# Altium PCB ALTAIR_PD_Squad_V26.5a_cut.PcbDoc (part 3 of 4)
Units mm, origin at the board's own origin, x right, y up, seen from the top; angles counter-clockwise.
Board outline 74 x 56 mm, 4 copper layers (Top Layer, Layer 2, Layer 3, Bottom Layer), stack 1.818 mm thick; 213 components, 155 nets, 610 pads, 404 vias.
Unrouted connection lines stored in the file: 6.
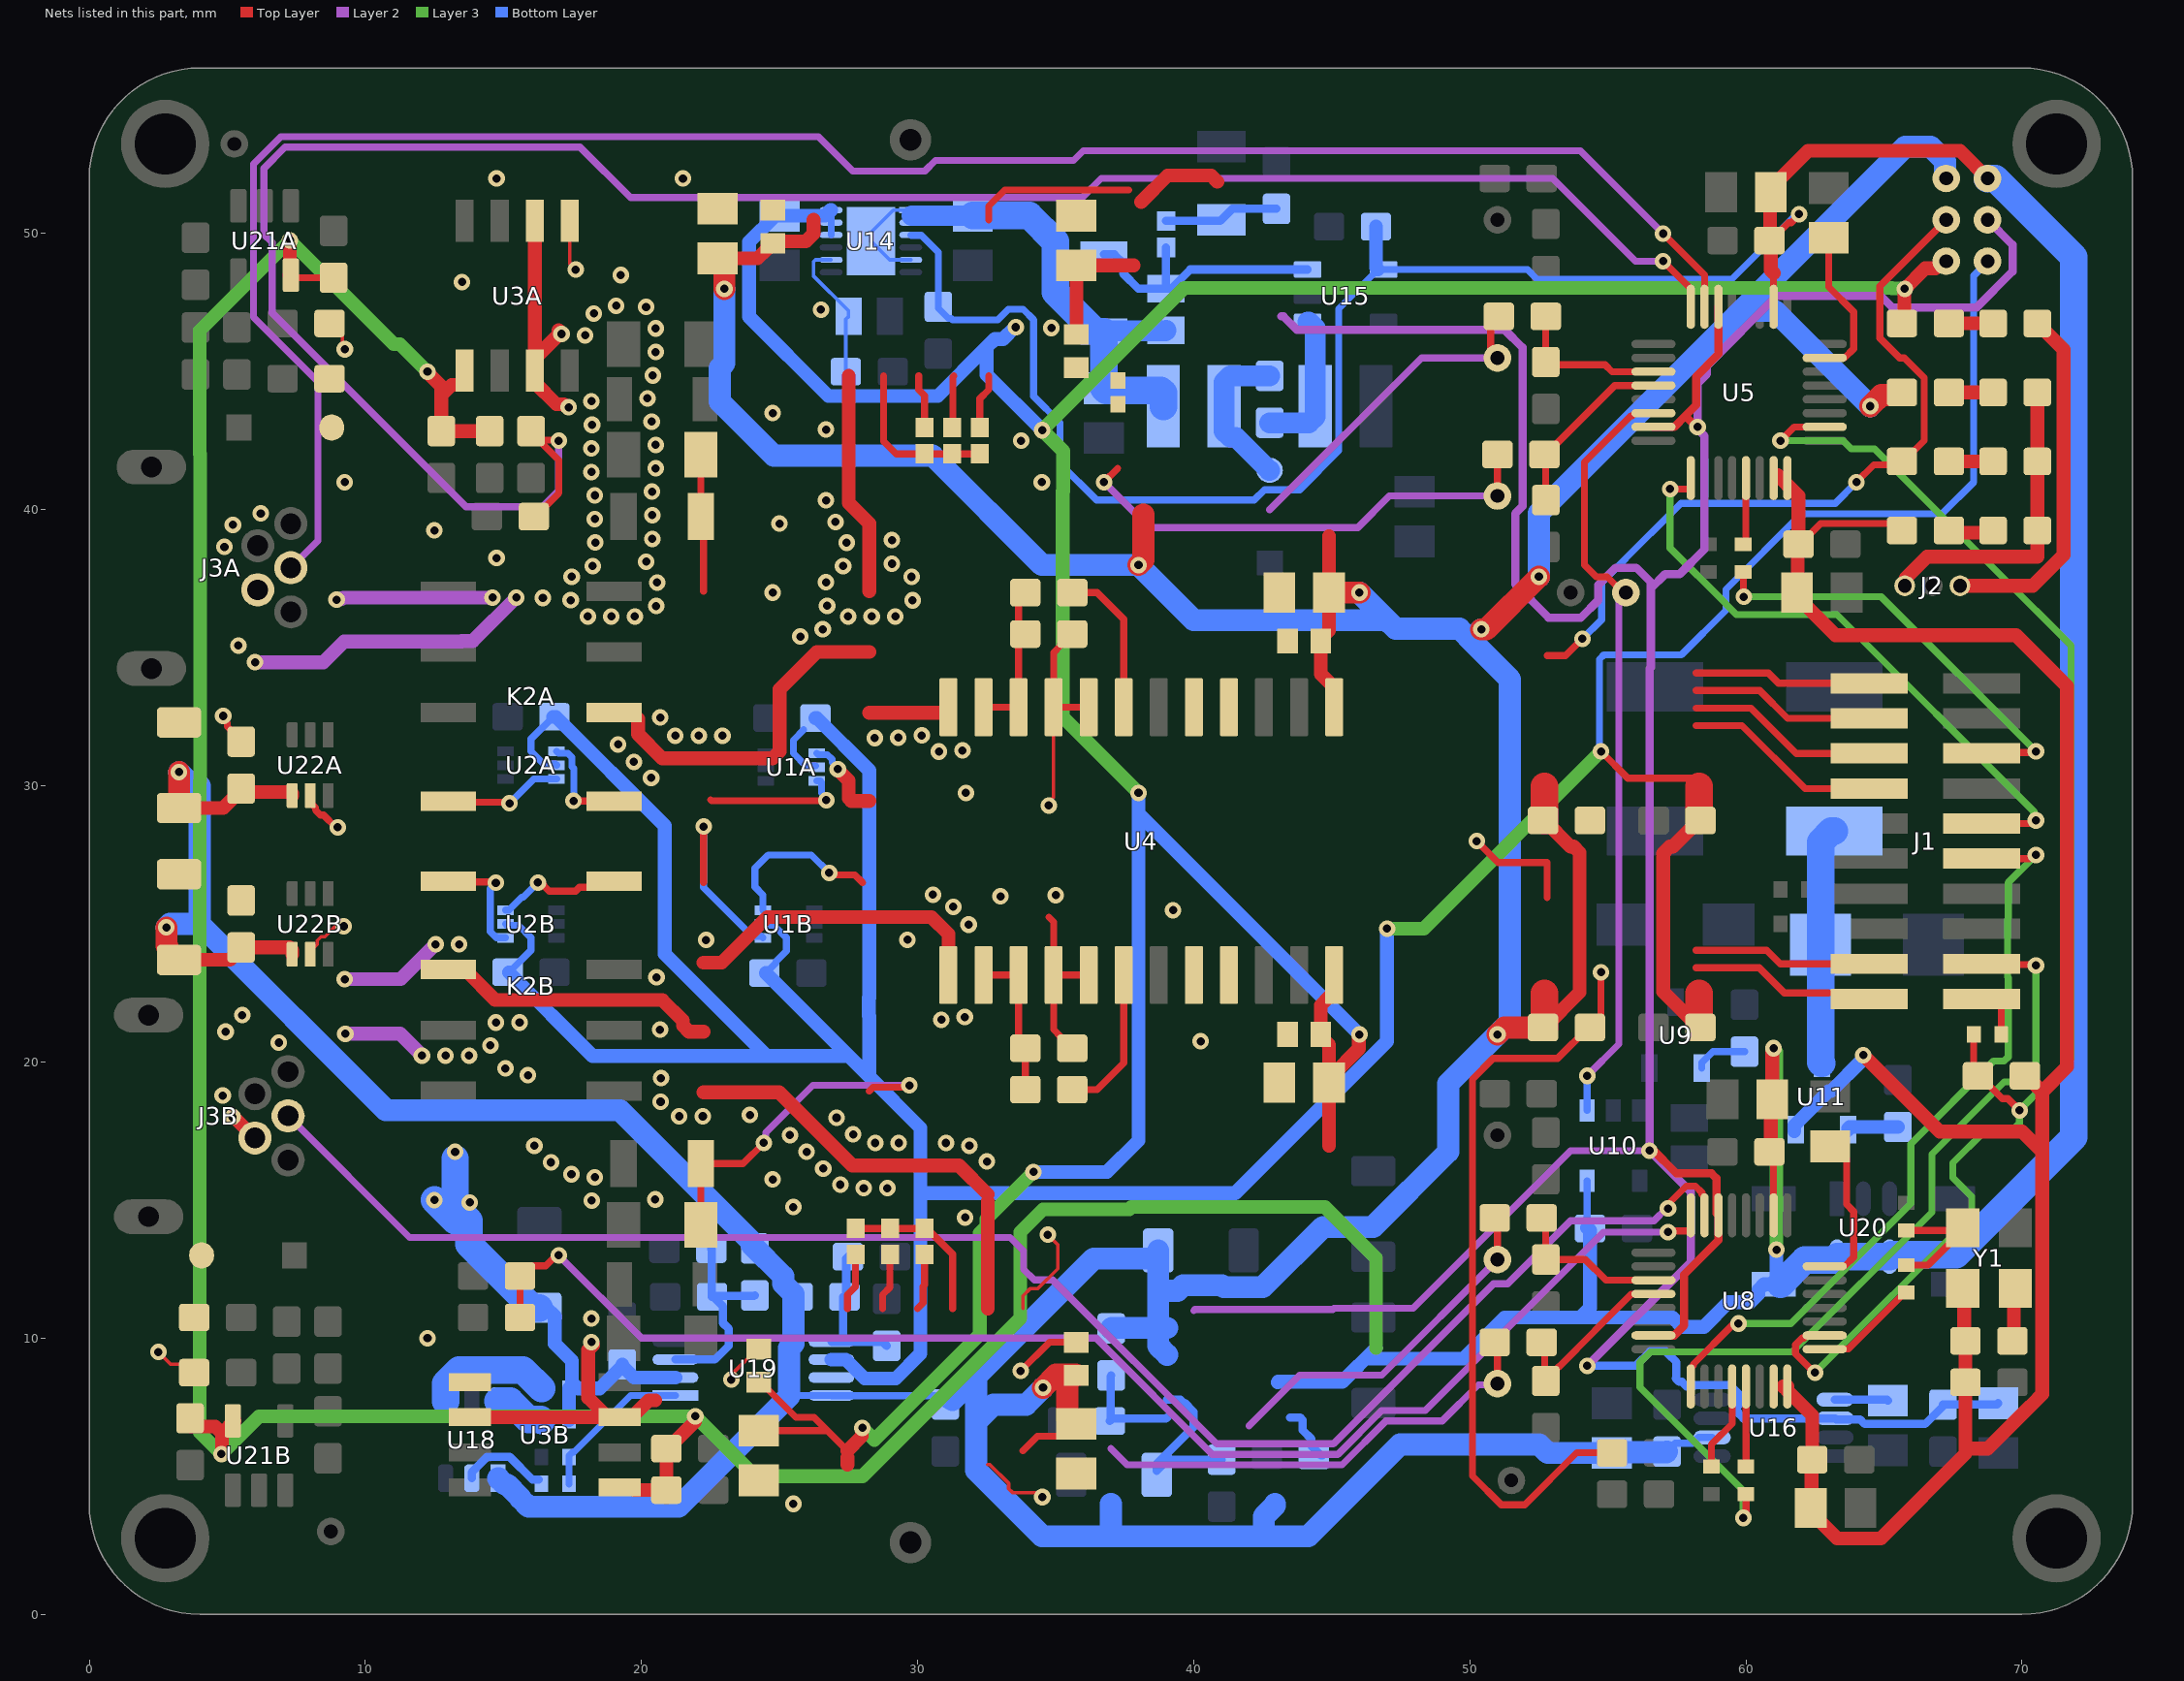
[diagram p4: the nets of this part, all layers, seen from the top]

## Via types
v1: diameter 0.6, hole 0.3, Top Layer to Bottom Layer, tented both sides, 303 vias
v2: diameter 0.8, hole 0.5, Top Layer to Bottom Layer, 97 vias
v3: diameter 0.6, hole 0.3, Top Layer to Bottom Layer, 4 vias

## Nets (pads, with @x,y where several pads share a name; then routed paths per layer and width w, separated by ;. In a path a pad name is that pad's centre, name@x,y a point inside that pad or via, vN(x,y) a via of type N, cw(c..) or ccw(c..) an arc to the next point about the centre after c; other vN are vias at no path point) (continued)
NetR15A_2: (continued)
  Top Layer w0.254: R15A.2@32.25,42.975 32.25,44.02 32.58,44.35 32.58,44.85
NetR15B_2: R15B.2 | length 2.1
  Top Layer w0.254: 27.46,11.075 27.46,11.575 27.75,11.865 R15B.2@27.75,13.025
NetR16A_2: R16A.2 | length 1.9
  Top Layer w0.254: R16A.2@31.25,42.975 31.28,43.005 31.28,44.82 31.31,44.85
NetR16B_2: R16B.2 | length 2.1
  Top Layer w0.254: 28.73,11.075 28.73,11.575 29,11.845 R16B.2@29,13.025
NetR17A_2: R17A.2 | length 2
  Top Layer w0.254: 30.04,44.85 30.04,44.35 30.25,44.14 R17A.2@30.25,42.975
NetR17B_2: R17B.2 | length 2.1
  Top Layer w0.254: 30,11.075 30.198,11.273 30.198,11.87 30.25,11.922 R17B.2@30.25,13.025
NetR18A1_1: R18A1.1
NetR18A2_1: 
NetR18B1_1: 
NetR18B1_2: R21.1 T7.1 | length 13
  Top Layer w0.254: R21.1@50.9,14.35 51,14.25 T7.1@51,12.85
  Layer 2 w0.254: 42,6.823 43.838,8.66 46.81,8.66 T7.1@51,12.85
NetR18B2_1: 
NetR18B2_2: R23.1 T8.1 | length 17
  Top Layer w0.254: R23.1@50.9,9.85 51,9.75 T8.1@51,8.35
  Layer 2 w0.254: 37,6 37.586,5.414 45.377,5.414 46.964,7 49,7 50.306,8.306 50.956,8.306 T8.1@51,8.35
NetR20_1: R20.1 U8.12 | length 3.2
  Top Layer w0.254: R20.1@58.75,5.35 58.75,6.155 59.5,6.905 U8.12@59.5,8.25
NetR22_1: R22.1 U8.13 | length 2.9
  Top Layer w0.254: R22.1@60,5.35 U8.13@60,8.25
NetR25_2: R25.2 U9.1 | length 1.9
  Bottom Layer w0.254: U9.1@58.4,19.775 58.4,19.975 58.8,20.375 R25.2@59.95,20.375
NetR28_2: R28.2 U11.1 | length 1.9
  Bottom Layer w0.5: U11.1@63.7,17.55 63.7,17.6 63.75,17.65 R28.2@65.5,17.65
NetR32_2: R32.2 R34.2 Y1.3 | length 4.8
  Top Layer w0.254: R34.2@65.8,12.65 66.6,12.65 67.85,13.9 Y1.3@67.85,14 67.75,13.9 R32.2@65.8,13.9
NetR33_1: R33.1 Y1.1 | length 1.9
  Top Layer w0.5: R33.1@69.65,9.9 69.7,9.95 69.7,11.75 Y1.1@69.75,11.8
NetR34_1: R34.1 U8.17 | length 3.8
  Top Layer w0.254: U8.17@62.85,9.6 62.859,9.609 63.709,9.609 65.75,11.65 R34.1@65.8,11.65
NetR42_1: R42.1 R43.2 | length 3.8
  Bottom Layer w0.3: R42.1@37.01,8.65 36.985,8.625 36.985,7.025 R43.2@36.96,7 37.047,7.087 38.997,7.087 39.035,7.125
NetR46_2: R46.2 | length 2.1
  Bottom Layer w0.3: 43.485,7.125 43.856,7.125 43.949,7.033 43.949,6.662 44.26,6.35 44.26,6.1 44.61,5.75 R46.2@44.66,5.75
NetR47_1: R47.1 U18.2 | length 3.2
  Bottom Layer w0.3: U18.2@13.854,4.924 13.854,5.149 14.406,5.701 15.227,5.701 16.054,4.874 R47.1@16.279,4.874
NetR47_2: R47.2 R51.2 U19.1 | length 5.8
  Bottom Layer w0.254: R47.2@17.379,4.724 17.379,5.749 17.502,5.872 17.552,5.872 19.604,7.924 U19.1@21.228,7.924
NetR48_2: R48.2 U18.6 | length 1.9
  Bottom Layer w1: U18.6@14.804,7.724 15.235,7.724 15.912,7.047 16.356,7.047 R48.2@16.379,7.024
NetR49_2: R49.2 U18.4 | length 4.6
  Bottom Layer w1: U18.4@12.904,7.724 12.904,8.355 13.4,8.851 15.702,8.851 R49.2@16.379,8.174